# Altium PCB Board.PcbDoc
Units mm, origin at the board's own origin, x right, y up, seen from the top; angles counter-clockwise.
Board outline 69.22 x 45.72 mm, 2 copper layers (Top Layer, Bottom Layer); 47 components, 49 nets, 184 pads, 43 vias.
Unrouted connection lines stored in the file: 1.
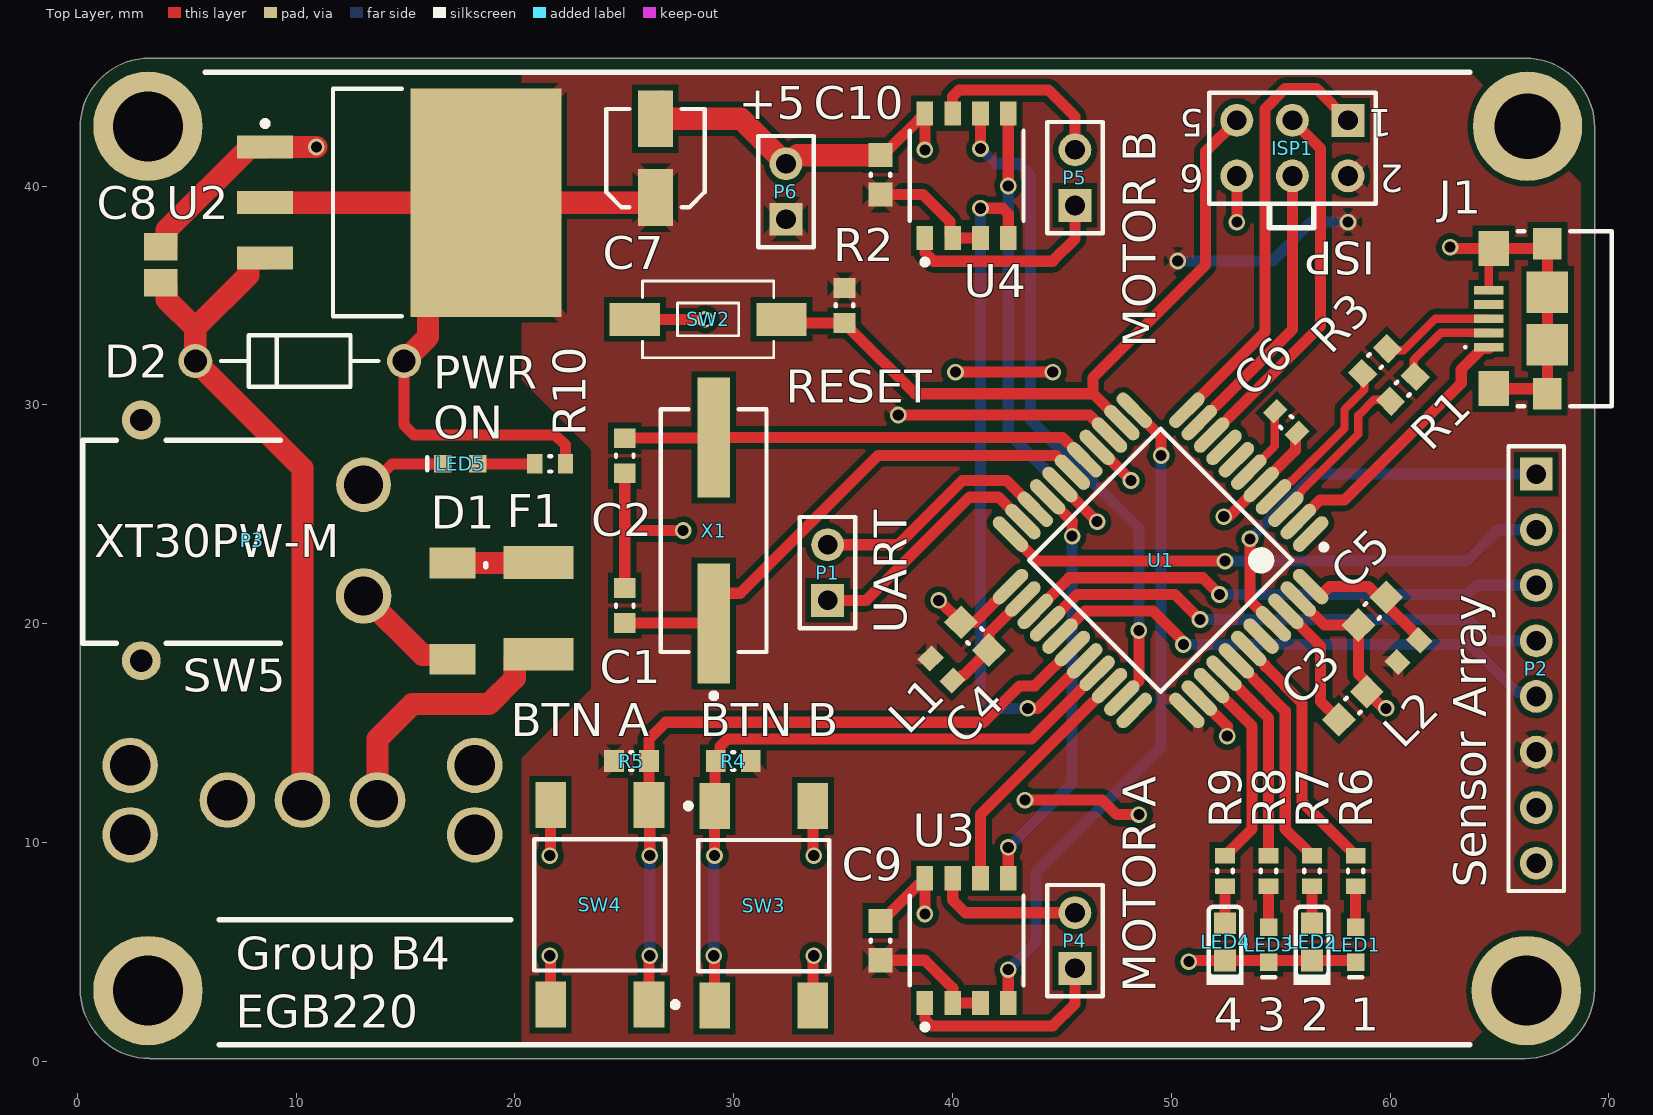
[diagram p0: Top Layer view]
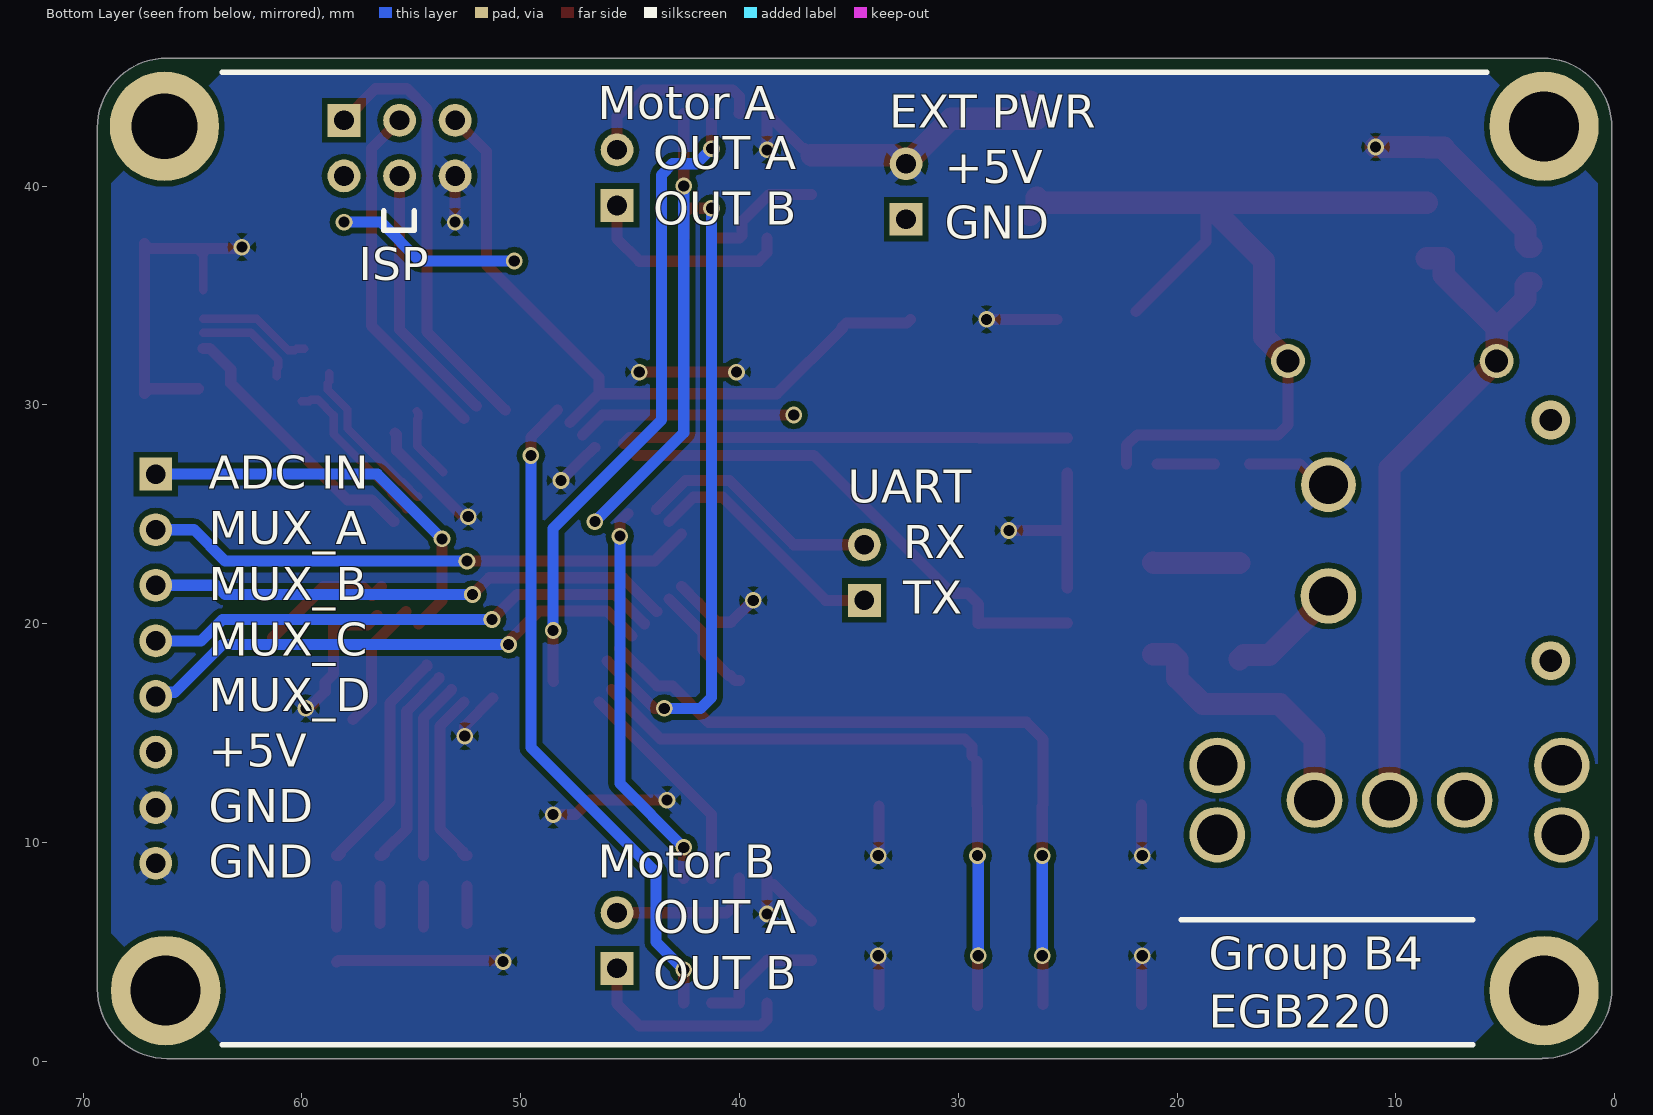
[diagram p1: Bottom Layer view, seen from below]

## Layer stack, top to bottom
Top Solder: solder mask 0.0102, Solder Resist, Dk 3.5
Top Layer: signal copper 0.0356
Dielectric 1: dielectric 0.32, FR-4, Dk 4.8
Bottom Layer: signal copper 0.0356
Bottom Solder: solder mask 0.0102, Solder Resist, Dk 3.5

## Board outline
0.13,3.302 0.13,42.672 0.127,42.672 cw(c3.302,42.672) 3.302,45.847 66.172,45.847 66.17,45.85 cw(c66.17,42.672) 69.347,42.672 69.345,42.675 69.345,3.302 cw(c66.17,3.302) 66.17,0.127 3.305,0.127 3.305,0.13 cw(c3.302,3.302)

## Design rules (kind name [scope] priority, off if disabled: settings)
Clearance [All] p1: gap=0.254 ignorepadtopadclearanceinfootprint=FALSE except(0: Arc-Hole Track-Hole SMDPad-Hole THPad-Hole Via-Hole Fill-Hole Poly-Hole Region-Hole Text-Hole)
DiffPairsRouting [All] p1: maxlimit=0.254 minlimit=0.254 mostfreqgap=0.254 toplayer_minwidth=0.381 toplayer_maxwidth=0.381 toplayer_prefwidth=0.381 bottomlayer_minwidth=0.381 bottomlayer_maxwidth=0.381 bottomlayer_prefwidth=0.381 maxuncoupledlength=12.7
PolygonConnect PolygonConnect_2 [All vs IsNamedPolygon('NONET_L01_P014')] p1: connectstyle=Direct reliefconductorwidth=0.254 reliefentries=4 polygonreliefangle="90 Angle" airgapwidth=0.254
PolygonConnect PolygonConnect_1 [All vs IsNamedPolygon('GND_L01_P008')] p2: connectstyle=Direct reliefconductorwidth=0.254 reliefentries=4 polygonreliefangle="90 Angle" airgapwidth=0.254
PolygonConnect [All] p3: connectstyle=Relief reliefconductorwidth=0.508 reliefentries=4 polygonreliefangle="45 Angle" airgapwidth=0.254
RoutingVias [All] p1: holewidth=0.508 width=0.762 viastyle="Through Hole" minholewidth=0.508 minwidth=0.762 maxholewidth=0.508 maxwidth=0.762
SolderMaskExpansion [All] p1: expansion=0.102
Width [All] p1: maxlimit=1.016 minlimit=0.254 preferedwidth=0.508 minimp=50.000000 maximp=50.000000 favimp=50.000000
29 further rules are at their usual default settings.

## Classes and differential pairs
component class MotorDriver: C9 C10 P4 P5 U3 U4
component class LinearRegulator: C7 C8 D2 LED5 P6 R10 U2
component class Input: D1 F1 LED1 LED2 LED3 LED4 P3 R4 R5 R6 R7 R8 R9 SW3 SW4 SW5
component class Control: C1 C2 C3 C4 C5 C6 ISP1 J1 L1 L2 P1 P2 R2 R3 SW2 U1 X1
differential pair USB: +USB_P -USB_N
differential pair USBCNX: +USBCNX_P -USBCNX_N

## Components (designator, comment, footprint, x,y, rotation, side; value= is the part's Value field where it differs from the comment)
C1 "CAP 22pF 16V" CAPC0603(1608)100_N 25.022,20.828 r270 top value=22pF
C2 "CAP 22pF 16V" CAPC0603(1608)100_N 25.022,27.681 r270 top value=22pF
C3 "CAP 100nF" CAPC0603(1608)100_M 58.296,16.256 r225 top value=100nF
C4 "CAP 100nF" CAPC0603(1608)100_M 41.024,19.431 r315 top value=100nF
C5 "CAP 100nF" CAPC0603(1608)100_M 59.185,20.574 r45 top value=100nF
C6 "CAP 1uF" CAPC0603(1608)100_L 55.248,29.21 r135 top value=1uF
C7 "UUD1E100MCL1GS" NIC-CAPA2-4X5.8_V 26.419,41.275 r90 top
C8 "TACR106M016XTA" CAPC2014X150X70NL20 3.813,36.401 r270 top
C9 "CAP 100nF" CAPC0603(1608)100_M 36.706,5.517 r270 top value=100nF
C10 "CAP 100nF" CAPC0603(1608)100_M 36.706,40.513 r270 top value=100nF
D1 "Schottky Rectifier 30V 5A" "SCHOTTKY DIODE 30V 5A" 17.148,20.574 r270 top
D2 "1N4002RLG" ONSC-AXIAL_LEAD-2-59-10_P 10.163,32.004 r0 top
F1 "5A 16V" "FUSE 5A 16V 1812" 21.085,20.701 r270 top
ISP1 "Header 3X2" HDR2X3 58.075,43.003 r180 top
J1 "1981568-1" TECO-1981568-5_V 64.511,33.939 r90 top
L1 "Inductor" 1608[0603] 39.5,17.907 r135 top value=10mH
L2 "Inductor" 1608[0603] 60.836,18.746 r225 top value=10mH
LED1 "2V 30mA 0603 Green" 0603_A 58.423,5.336 r90 top
LED2 "2V 20mA 0603 Org" KING-LED0603-25-ORANGE_V 56.433,5.458 r90 top
LED3 "2V 30mA 0603 Green" 0603_A 54.443,5.336 r90 top
LED4 "2V 20mA 0603 Org" KING-LED0603-25-ORANGE_V 52.454,5.458 r90 top
LED5 "2V 20mA 0603 Red" 0603_A 17.498,27.305 r0 top
P1 "UARTCON" HDR1X2 34.293,21.067 r90 top
P2 "SENSBOARD" HDR1X8 66.678,26.835 r270 top
P3 "XT30U- M" XT30U-M 8.004,23.808 r90 top
P4 "Header 2" HDR1X2 45.596,4.247 r90 top
P5 "Header 2" HDR1X2 45.596,39.116 r90 top
P6 "PWR IN" HDR1X2 32.388,38.481 r90 top
R1 "22R" RESC0603(1608)_N 60.582,30.734 r45 top value="22.00 Ohm"
R2 "10K 5% 0603(1608)" RESC0603(1608)_N 35.055,34.544 r90 top value="10000.00 Ohm"
R3 "22R" RESC0603(1608)_N 59.312,32.004 r45 top value="22.00 Ohm"
R4 "10K 5% 0603(1608)" RESC0603(1608)_N 29.975,13.716 r0 top value="10000.00 Ohm"
R5 "10K 5% 0603(1608)" RESC0603(1608)_N 25.326,13.716 r180 top value="10000.00 Ohm"
R6 "100R 5% 0603(1608)" RESC0603(1608)_L 58.423,8.698 r270 top value="100.00 Ohm"
R7 "100R 5% 0603(1608)" RESC0603(1608)_L 56.433,8.698 r90 top value="100.00 Ohm"
R8 "100R 5% 0603(1608)" RESC0603(1608)_L 54.443,8.698 r270 top value="100.00 Ohm"
R9 "100R 5% 0603(1608)" RESC0603(1608)_L 52.454,8.698 r90 top value="100.00 Ohm"
R10 "150R 5% 0603(1608)" RESC0603(1608)_L 21.611,27.305 r0 top value="150.00 Ohm"
SW2 "434121050816" 434121050816 28.832,33.909 r180 top
SW3 "4-1437565-1" TECO-4-1437565-1_V 31.372,7.113 r0 top
SW4 "4-1437565-1" TECO-4-1437565-1_V 23.879,7.152 r180 top
SW5 "1101M2S3__BE2" 1101M2S3__BE2 10.29,11.938 r90 top
U1 "ATmega32U4-AU" 44ML_M 49.508,22.896 r225 top
U2 "LM1084IS-5.0/NOPB" KTT0003B_L 14.735,39.243 r0 top
U3 "BD6221F-E2" ROHM-SOP-8_V 40.643,5.517 r90 top
U4 "BD6221F-E2" ROHM-SOP-8_V 40.643,40.475 r90 top
X1 "ATS16ASM-1" CTS-ATS-SM-XTAL-2 29.086,24.257 r90 top

## Footprints (in the part's own frame and the unit in brackets; to place one, negate y for a bottom-side part, rotate by r counter-clockwise, add the part's x,y. Pads: shape width x height; smd on the part's side, far side on the other; paste and mask are expansions set on the pad)
44ML_M [mm] "Thin QFP, 44-Leads, Body 10x10mm, Pitch 0.8mm, IPC Low Density"
  oval 2.05x0.6 smd: 1(-5.7,4) 2(-5.7,3.2) 3(-5.7,2.4) 4(-5.7,1.6) 5(-5.7,0.8) 6(-5.7,0) 7(-5.7,-0.8) 8(-5.7,-1.6) 9(-5.7,-2.4) 10(-5.7,-3.2) 11(-5.7,-4) 23(5.7,-4) 24(5.7,-3.2) 25(5.7,-2.4) 26(5.7,-1.6) 27(5.7,-0.8) 28(5.7,0) 29(5.7,0.8) 30(5.7,1.6) 31(5.7,2.4) 32(5.7,3.2) 33(5.7,4)
  oval 0.6x2.05 smd: 12(-4,-5.7) 13(-3.2,-5.7) 14(-2.4,-5.7) 15(-1.6,-5.7) 16(-0.8,-5.7) 17(0,-5.7) 18(0.8,-5.7) 19(1.6,-5.7) 20(2.4,-5.7) 21(3.2,-5.7) 22(4,-5.7) 34(4,5.7) 35(3.2,5.7) 36(2.4,5.7) 37(1.6,5.7) 38(0.8,5.7) 39(0,5.7) 40(-0.8,5.7) 41(-1.6,5.7) 42(-2.4,5.7) 43(-3.2,5.7) 44(-4,5.7)
  silkscreen extent -5.82,-4.25 4.25,4.97, body extent -5,-5 5,5, height 1.2
0603_A [mm] "Chip LED, 2-Leads, Body 1.6x0.8mm, IPC Medium Density"
  rect 0.8x0.8 smd: 1(-0.8,0) 2(0.8,0)
  silkscreen extent -1.5,-0.3 -1.5,0.3, body extent -0.8,-0.4 0.8,0.4, height 0.7
1101M2S3__BE2 [mil]
  round 100 hole 73: 1(0,135) 2(0,0) 3(0,-135) N/C(-62.5,310) N/C(-62.5,-310) N/C(62.5,310) N/C(62.5,-310)
  body extent -170,-320 170,320, height 525
1608[0603] [mm] "Chip Capacitor, Body 1.6x0.8mm, IPC High Density"
  rect 0.8x0.9 smd: 1(-0.7,0) 2(0.7,0)
  body extent -0.87,-0.47 0.87,0.47, height 1.3
434121050816 [mm] "6.0*3.5mm vertical type, SMD, height 5.0mm, black actuator, 160gf, T&R"
  rect 2.3x1.5 smd: 1(-3.35,0) 2(3.35,0)
  silkscreen extent -3,-1.75 3,1.75, body extent -4,-1.75 4,1.75, height 5
CAPC0603(1608)100_L [mm] "Chip Capacitor, Body 1.6x0.8mm, Height 1.0mm, IPC High Density"
  rect 0.7x0.9 smd: 1(-0.7,0) 2(0.7,0)
  silkscreen extent -0.05,-0.35 0.05,0.35, body extent -0.88,-0.47 0.88,0.48, height 1
CAPC0603(1608)100_M [mm] "Chip Capacitor, Body 1.6x0.8mm, Height 1.0mm, IPC Low Density"
  rect 1.1x1.1 smd: 1(-0.9,0) 2(0.9,0)
  silkscreen extent -0.05,-0.45 0.05,0.45, body extent -0.87,-0.47 0.88,0.48, height 1
CAPC0603(1608)100_N [mm] "Chip Capacitor, Body 1.6x0.8mm, Height 1.0mm, IPC Medium Density"
  rect 0.9x1 smd: 1(-0.8,0) 2(0.8,0)
  silkscreen extent -0.05,-0.4 0.05,0.4, body extent -0.87,-0.48 0.88,0.47, height 1
CAPC2014X150X70NL20 [mm] "Chip Capacitor, 2-Leads, Body 2.00x1.35mm, IPC Medium Density"
  rect 1.25x1.55 smd: 1(-0.825,0) 2(0.825,0)
  body extent -1.1,-0.77 1.1,0.77, height 1.5
CTS-ATS-SM-XTAL-2 [mm] "SMD, 2-Leads, Body 11.1x4.83mm, Pitch 8.5mm"
  rect 5.5x1.5 smd: 1(-4.25,0) 2(4.25,0)
  silkscreen extent -7.67,-2.41 5.55,2.41, body extent -5.59,-2.42 5.59,2.42, height 4.3
"FUSE 5A 16V 1812" [mm]
  rect 1.5x3.2 smd: 1(-2.1,0) 2(2.1,0)
  body extent -2.18,-1.59 2.18,1.59, height 0.76
HDR1X2 [mm] "Connector; Header; 2 Position"
  rect 1.5x1.5 hole 0.9: 1(0,0)
  round 1.5 hole 0.9: 2(2.54,0)
  silkscreen extent -1.27,-1.27 3.81,1.27
HDR1X8 [mm] "Connector; Header; 8 Position"
  rect 1.5x1.5 hole 0.9: 1(0,0)
  round 1.5 hole 0.9: 2(2.54,0) 3(5.08,0) 4(7.62,0) 5(10.16,0) 6(12.7,0) 7(15.24,0) 8(17.78,0)
  silkscreen extent -1.27,-1.27 19.05,1.27
HDR2X3 [mm] "Connector; Header; 3x2 Position"
  rect 1.5x1.5 hole 0.9: 1(0,0)
  round 1.5 hole 0.9: 2(0,2.54) 3(2.54,0) 4(2.54,2.54) 5(5.08,0) 6(5.08,2.54)
  silkscreen extent -1.27,-1.27 6.35,3.81
KING-LED0603-25-ORANGE_V [mm] "LED, SMT, Body 1.6 x 0.8 mm, 0.25mm Thickness"
  rect 1x1 smd paste+0 mask+0: 1(0.85,0) 2(-0.85,0)
  silkscreen extent -1.97,-0.85 1.6,0.85, body extent -0.8,-0.4 0.8,0.4, height 0.25
KTT0003B_L [mm] "D2-PAK, 3-Leads, Body 10.41x8.89mm, Pitch 2.54mm, IPC High Density"
  rect 2.55x1.05 smd: 1(-6.15,2.54) 2(-6.15,0) 3(-6.15,-2.54)
  rect 6.9x10.45 smd: 4(3.95,0)
  silkscreen extent -6.27,-5.2 0.1,5.2, body extent -6.83,-5.2 7.52,5.2, height 4.64
NIC-CAPA2-4X5.8_V [mm] "Aluminum Electrolytic Capacitor, Diameter 4mm, Height 6.1mm, Pitch 3.6mm"
  rect 2.6x1.6 smd: 1(-1.8,0) 2(1.8,0)
  silkscreen extent -2.25,-2.25 2.25,2.25, body extent -2,-1.98 2,2, height 6.1
ONSC-AXIAL_LEAD-2-59-10_P [mm] "AXIAL, 2-Leads, Diameter 2.35mm"
  round 1.55 hole 1.05: 1(-4.77,0) 2(4.77,0)
  silkscreen extent -3.59,-1.17 3.59,1.17
RESC0603(1608)_L [mm] "Chip Resistor, Body 1.6x0.8mm, IPC High Density"
  rect 0.7x0.9 smd: 1(-0.7,0) 2(0.7,0)
  silkscreen extent -0.05,-0.35 0.05,0.35, body extent -0.85,-0.47 0.85,0.47, height 0.6
RESC0603(1608)_N [mm] "Chip Resistor, Body 1.6x0.8mm, IPC Medium Density"
  rect 0.9x1 smd: 1(-0.8,0) 2(0.8,0)
  silkscreen extent -0.05,-0.4 0.05,0.4, body extent -0.85,-0.47 0.85,0.47, height 0.6
ROHM-SOP-8_V [mm] "SOP, 8-Leads, Body 5.2x4.6mm, Pitch 1.27mm"
  rect 1.1x0.76 smd: 1(-2.85,1.905) 2(-2.85,0.635) 3(-2.85,-0.635) 4(-2.85,-1.905) 5(2.85,-1.905) 6(2.85,-0.635) 7(2.85,0.635) 8(2.85,1.905)
  silkscreen extent -4.07,-2.6 2.05,2.6, body extent -2.3,-2.6 2.3,2.6, height 1.6
"SCHOTTKY DIODE 30V 5A" [mm]
  rect 1.4x2.1 smd: 1(-2.2,0) 2(2.2,0)
  silkscreen extent -2.16,1.52 -2.03,1.52, body extent -1.9,-1.25 1.9,1.25, height 0.25
TECO-4-1437565-1_V [mil] "SMD, 4-Leads, Body 6x6mm, Pitch 9.1mm"
  rect 55x83 smd: 1(-88.5,179.5) 2(-88.5,-179.5) 3(88.5,179.5) 4(88.5,-179.5)
  silkscreen extent -141,-118 118,184, body extent -118,-197 118,197, height 200
TECO-1981568-5_V [mm] "SMD, 5-Leads, Body 8x5.9mm, Pitch 0.65mm"
  rect 0.4x1.35 smd: 1(-1.3,0) 2(-0.65,0) 3(0,0) 4(0.65,0) 5(1.3,0)
  rect 1.6x1.4 smd: 6(-3.2,-0.225) 7(3.2,-0.225)
  rect 1.45x1.3 smd: 8(-3.425,-2.675) 9(3.425,-2.675)
  rect 1.9x1.9 smd: 10(-1.2,-2.675) 11(1.2,-2.675)
  silkscreen extent -4,-5.63 4,1.12, body extent -4,-5.63 4,0.28, height 3
XT30U-M [mil]
  round 100 hole 70: 1(-100,-200)
  round 98.43 hole 70: 2(100,-200)
  round 70 hole 40: N/C(-216.54,200) N/C(216.54,200)
  silkscreen extent -185,-50 180,305, body extent -185,-250 180,305, height 160

## Part data
C1 C2: library part CMP-1035-00808-1, "CAP 22pF 16V ±5% 0603 (1608 Metric) Thickness 1mm SMD", Case-EIA=0603, Case-Metric=1608, Rated Voltage="16 V", Tolerance=±5%, Max Thickness="1 mm", Technology=SMT
C3 C4 C5 C9 C10: library part CMP-1035-02583-1, "CAP 100nF 16V ±5% 0603 (1608 Metric) Thickness 1mm SMD", Case-EIA=0603, Case-Metric=1608, Rated Voltage="16 V", Tolerance=±5%, Max Thickness="1 mm", Technology=SMT
C6: library part CMP-1035-02740-1, "CAP 1uF 25V ±10% 0603 (1608 Metric) Thickness 1mm SMD", Case-EIA=0603, Case-Metric=1608, Rated Voltage="25 V", Tolerance=±10%, Max Thickness="1 mm", Technology=SMT
C7: library part CMP-0687-00016-1, "Aluminum Electrolytic Capacitor, UD Series, Low Impedance, 10 uF, 25 V, + / - 20%, -55 to 105 degC, Chip Type, 4 x 5.8 mm D x L, Pb-Free, Reel", Manufacturer=Nichicon, Rated Capacitance="10 uF", Rated Ripple Current (at 100kHz)="80 mA", Rated Voltage="25 V", Tolerance Rated Capacitance="-20 to 20%", ComponentLink1Description="Manufacturer URL", ComponentLink1URL=http://www.nichicon.co.jp/, ComponentLink2Description=Datasheet, ComponentLink2URL=http://products.nichicon.co.jp/en/pdf/XJA043/e-ud.pdf, ComponentLink3Description="Package Specification", ComponentLink3URL=http://products.nichicon.co.jp/en/pdf/XJA043/e-ud.pdf, DatasheetVersion=08/2012, Diameter="4 mm", Endurance Time="2000 h", Impedance="1.8 Ohm", Length="5.8 mm", Mounting Technology="Surface Mount", PackageDescription="2-Pin Surface Mount Device, Diameter 4 mm, Height 5.8 mm, Pitch 3.6 mm", PackageReference=CAPAE-D4H5.8, Packing="Dia382mm Reel", PartNumber=UUD1E100MCL1GS, RoHS=TRUE
C8: library part CMP-2007-00027-1, Manufacturer="AVX Interconnect / Elco", Part Number=TACR106M016XTA
D2: library part CMP-0902-00183-1, "Standard Recovery Rectifier, 2-Pin Axial_Lead, Pb-Free, Tape and Reel", Manufacturer="On Semiconductor", ComponentLink1Description="Manufacturer URL", ComponentLink1URL=http://www.onsemi.com/, ComponentLink2Description=Datasheet, ComponentLink2URL=http://www.onsemi.com/pub_link/Collateral/1N4001-D.PDF, ComponentLink3Description="Package Specification", ComponentLink3URL=http://www.onsemi.cn/pub_link/Collateral/59-10.PDF, DatasheetVersion="Rev. 13", IFSM Max (A)=30, IO(rec) Max (A)=1, Mounting Technology="Through Hole", PackageDescription="2-Pin, Axial Lead, Diameter 2.35 mm", PackageReference=AXIAL_LEAD-2-59-10, PackageVersion="Rev. U, 02/2005", Packing="Tape and Reel", PartNumber=1N4002RLG, RoHS=TRUE, Type="Standard Recovery", VRRM Max (V)=100
F1: library part "Fuse 16V 5A 1812", ComponentLink1Description=Datasheet, ComponentLink1URL=https://www.bourns.com/docs/Product-Datasheets/mfmsmf.pdf, ComponentLink2Description=Supplier, ComponentLink2URL=https://www.digikey.com.au/product-detail/en/bourns-inc/MF-MSMF250-16X-2/MF-MSMF250-16X-2CT-ND/3437789
ISP1: "Header, 3-Pin, Dual row", LatestRevisionDate=17-Jul-2002, LatestRevisionNote="Re-released for DXP Platform.", Publisher="Altium Limited"
J1: library part CMP-2000-05408-1, "Micro USB Receptacle Standard Type B Assy, 5-Pin SMD, RoHS, Tape and Reel", Current Rating (Max)=1/ContactA, Manufacturer="TE Connectivity", Operating Temperature Max Deg. C=85C, Operating Temperature Min Deg. C=-55C, Operating Temp Range=-55Cto85C, Voltage Rating Max=30VAC, Body Orientation=RightAngle, Contact Material=CopperAlloy, Contact Plating=GoldOverNickel, Datasheet URL=http://www.mouser.com/ds/2/418/NG_CD_1981568_E2-621296.pdf, Datasheet Version="Rev. E2, 08/2015", Gender=RCP, Housing Material=Thermoplastic, Manufacturer URL=http://www.te.com/, Mounting Style=SurfaceMount, Number of Contacts=5POS, Number of Ports=1Port, Number of Terminals=5, Packaging=TapeandReel, Pitch (mm)=0.65mm, Product Depth (mm)=5.6mm, Product Height (mm)=3mm, Product Length (mm)=8mm, Termination Method=Solder, Type=MicroUSB
LED1 LED3: library part CMP-1426-00006-1, "SMD mono-color Chip LED, WL-SMCW, Bright Green", Color="Bright Green", Manufacturer="Wuerth Elektronik", PartNumber=150060VS75000, ComponentLink1Description="Manufacturer URL", ComponentLink1URL=http://www.we-online.com, ComponentLink2Description=Datasheet, ComponentLink2URL=http://katalog.we-online.com/led/datasheet/150060VS75000.pdf, PackageReference=0603_A
LED2 LED4: library part CMP-0239-00002-1, "LED, SMT, 0603(1608), 0.25mm Tthickness, Super Bright Orange", Forward Current="30 mA", PartNumber=APG1608SEKC/T, Power Dissipation="75 mW", Reverse Voltage="5 V", Storage Temperature="-40 to 85 degC", ComponentLink1Description="Manufacturer URL", ComponentLink1URL=http://www.kingbrightusa.com/, ComponentLink2Description=Datasheet, ComponentLink2URL=http://www.kingbrightusa.com/images/catalog/SPEC/APG1608SEKC-T.pdf, DatasheetVersion="Rev. 4A, 12/2011", Mounting Technology="Surface Mount", PackageDescription="2-Pin SMT LED, 1.6 x 0.8 mm Body, 0.25mm Thickness", PackageReference=LED0603-25-ORANGE, PackageVersion="Rev. 4A, 12/2011", Packing=Reel
LED5: library part CMP-1426-00001-1, "SMD mono-color Chip LED, WL-SMCW, Red", Color=Red, Manufacturer="Wuerth Elektronik", PartNumber=150060RS75000, ComponentLink1Description="Manufacturer URL", ComponentLink1URL=http://www.we-online.com, ComponentLink2Description=Datasheet, ComponentLink2URL=http://katalog.we-online.com/led/datasheet/150060RS75000.pdf, PackageReference=0603_A
P1 P6: library part "Header 2", "Header, 2-Pin", LatestRevisionDate=17-Jul-2002, LatestRevisionNote="Re-released for DXP Platform.", Publisher="Altium Limited"
P2: library part "Header 8", "Header, 8-Pin", LatestRevisionDate=17-Jul-2002, LatestRevisionNote="Re-released for DXP Platform.", Publisher="Altium Limited"
P4 P5: "Header, 2-Pin", LatestRevisionDate=17-Jul-2002, LatestRevisionNote="Re-released for DXP Platform.", Publisher="Altium Limited"
R1 R3: library part CMP-1012-00034-1, "22R 0.1W 5% 0603 (1608 Metric)  SMD", Case-EIA=0603, Case-Metric=1608, Power="0.1 W", Tolerance="5 %", Technology=SMT
R2 R4 R5: library part CMP-1012-00098-1, "10K 0.1W 5% 0603 (1608 Metric)  SMD", Case-EIA=0603, Case-Metric=1608, Power="0.1 W", Tolerance="5 %", Technology=SMT
R6 R7 R8 R9: library part CMP-1012-00050-1, "100R 0.1W 5% 0603 (1608 Metric)  SMD", Case-EIA=0603, Case-Metric=1608, Power="0.1 W", Tolerance="5 %", Technology=SMT
R10: library part CMP-1012-00054-1, "150R 0.1W 5% 0603 (1608 Metric)  SMD", Case-EIA=0603, Case-Metric=1608, Power="0.1 W", Tolerance="5 %", Technology=SMT
SW2: library part CMP-1459-00007-1, "WS-TASV SMD Tact Switch 6.0X3.5 mm", Manufacturer="Wuerth Elektronik", ComponentLink1Description="Manufacturer URL", ComponentLink1URL=http://www.we-online.com, ComponentLink2Description=Datasheet, ComponentLink2URL=http://katalog.we-online.de/em/datasheet/434121050816.pdf, NoPins=02, PackageReference=434121050816, PartNumber=434121050816
SW3 SW4: library part CMP-2000-05602-1, "Tactile Switch, 50 mA, 12 VDC, -20 to 85 degC, 4-Pin SMD, RoHS, Bulk", Actuator Color=N/A, Contact Rating @ Voltage=0.05@12VDCA, Dielectric Strength=500VAC, Manufacturer=TEConnectivity/AMPBrand, Maximum Contact Resistance=100mOhm, Maximum DC Voltage Rating=12V, Minimum Insulation Resistance=100MOhm, Operating Force=1.57N, Operating Temperature=-20to85C, Package Description="4-Pin Surface Mount Device, Body 6 x 6 mm, Pitch 9.1 mm", Actuator Length=1.4mm, Actuator Style=RoundButton, Base Material=N/A, Body Orientation=Straight, Contact Material=CopperAlloy, Contact Plating=Silver, Datasheet URL=https://datasheet.ciiva.com/14635/0900766b80912216-14635826.pdf, Datasheet Version=04/2007, Dimension=6x10x5.25mm, Electrical Life=100000Cycle, Family=FSMJSMA, Ground Terminal=No, Housing Material=N/A, Illumination Type=N/R, Manufacturer URL=http://www.te.com/, Maximum AC Voltage Rating=N/A, Mechanical Life=N/A, Mounting=SurfaceMount,GullWing, Mounting Technology=SurfaceMount, Package Reference=4-1437565-1, Packaging=Bulk, Part No=4-1437565-1, Pole Throw Configuration=N/A, Product Weight=N/A, RoHS=Yes, Seal Description=N/A, Seal Location=N/A, Switch Configuration=N/A, Type=N/A
U1: library part CMP-0095-00285-2, "8-bit AVR Microcontroller, 2.7-5.5V, 16MHz, 32KB Flash, 1KB EEPROM, 2.5KB SRAM, USB Controller, 44-pin TQFP, Industrial Grade (-40°C to 85°C), Ext Osc", ComponentLink1Description="Manufacturer URL", ComponentLink1URL=http://www.atmel.com/, ComponentLink2Description="ATmega16U4/32U4 Datasheet", ComponentLink2URL=http://www.atmel.com/dyn/resources/prod_documents/doc7766.pdf, ComponentLink3Description="ATmega16U4 ATmega32U4 Summary", ComponentLink3URL=http://www.atmel.com/dyn/resources/prod_documents/7766S.pdf, DatasheetVersion="revF, Nov-2010", PackageDescription="44-Pin Plastic Thin Quad Flat Pack, 10 x 10 x 1.0 mm Body, 0.8 mm Pitch (TQFP)", PackageReference=44ML, PackageVersion="rev.G, Jul-2007", RevisionNote="DatasheetVersion updated. URLs added."
U2: library part CMP-0062-00575-5, "5A Low Dropout Positive Regulators, 3-pin TO-263, Pb-Free", Manufacturer="Texas Instruments", PackageTopMarking=NSUZXYTTE#*LM1084*IS-5.0, PowerWise=N, Code_JEDEC=MO-169-AA, ComponentLink1Description="Datasheet URL", ComponentLink1URL=http://www.ti.com/general/docs/lit/getliterature.tsp?genericPartNumber=LM1084&fileType=pdf, CompType="LDO IC", High-Reliability=Y, PackageDescription="TO-263, Molded, .400 x .390 x .180in, 3 Lead, .1in Pitch, Surface Mount", PackageReference=KTT0003B, PartNumber=LM1084IS-5.0/NOPB, PinCount=3, RoHS=Y
U3 U4: library part CMP-1539-00001-1, "DC Brush Motor Driver, 6 to 18 V, 1 A, -40 to 85 degC, 8-Pin SOP, RoHS, Tape and Reel", Manufacturer="ROHM Semiconductor", Output Current="1 A Max.", Supply Voltage="6 to 15 V", Temperature Range="-40 to 85 degC", ComponentLink1Description="Manufacturer URL", ComponentLink1URL=http://www.rohm.com/web/global/, ComponentLink2Description=Datasheet, ComponentLink2URL=http://rohmfs.rohm.com/en/products/databook/datasheet/ic/motor/dc/bd622x-e.pdf, ComponentLink3Description="Package Specification", ComponentLink3URL=http://rohmfs.rohm.com/en/products/databook/package/spec/ic/sop-1-2-e.pdf, DatasheetVersion="Rev. 003", Mounting Technology="Surface Mount", PackageDescription="8-Pin Small Outline Package, Body 5 x 4.4 mm, Pitch 1.27 mm", PackageVersion="Rev. A", Packing="Tape and Reel", PartNumber=BD6221F-E2, RoHS=TRUE, RON@IOUT="0.5 A=1.5 Ohm Typ."
X1: library part CMP-0585-00002-2, "ATS-SM Series Quartz Crystal, 16 MHz, -20 to 70 degC, 11.1 x 4.83 x 4.3mm SMD, RoHS, Tape and Reel", Frequency="16 MHz", Manufacturer="CTS Corporation", Operating Temperature="-20 to 70 degC", Shunt Capacitance (C0)="7.0 pF Max", ComponentLink1Description="Manufacturer URL", ComponentLink1URL=http://www.ctscorp.com/, ComponentLink2Description=Datasheet, ComponentLink2URL=http://www.ctscorp.com/components/Datasheets/008-0309-0.pdf, ComponentLink3Description="Package Specification", ComponentLink3URL=http://www.ctscorp.com/components/Datasheets/008-0309-0.pdf, Crystal Cut=AT-Cut, DatasheetVersion="Rev. K", Drive Level (Type)="100 uW", ESR Maximum="40 Ohms", Mounting Technology="Surface Mount", Oscillation Mode="Fundamental or 3rd Overtone", PackageDescription="2-Pin SMD, Body 11.1 x 4.83 mm, Pitch 8.5 mm", PackageReference=ATS-SM-XTAL-2, Packing="Tape and Reel", PartNumber=ATS16ASM-1, RoHS=TRUE
D1: ComponentLink1Description=Datasheet, ComponentLink1URL=https://assets.nexperia.com/documents/data-sheet/PMEG3050EP.pdf
L1 L2: Code_IEC=1005, Code_JEITA=0402, LatestRevisionDate=29-May-2009, LatestRevisionNote="IPC-7351 Footprint Added.", PackageDescription="Chip Inductor", PackageReference=0402-A, Published=8-Jun-2000, Publisher="Altium Limited"

## Free pads (board coordinates)
  round 5 hole 3.2 unplated: M3(3.23,3.232) M3(3.23,42.732) M3(66.23,3.232)
  round 5 hole 3 unplated: M3(66.28,42.732)

## Via types
v1: diameter 0.762, hole 0.508, Top Layer to Bottom Layer, 43 vias

## Nets (pads, with @x,y where several pads share a name; then routed paths per layer and width w, separated by ;. In a path a pad name is that pad's centre, name@x,y a point inside that pad or via, vN(x,y) a via of type N, cw(c..) or ccw(c..) an arc to the next point about the centre after c; other vN are vias at no path point)
+5: C7.1 C9.2 C10.2 D2.2 ISP1.2 L1.2 L2.2 P2.6 P6.1 R2.2 R4.2 R5.2 R10.2 U1.14 U1.34 U2.2 U2.4 U3.2 U3.3 U4.2 U4.3 | length 75.6
  Top Layer w0.508: D2.2 14.933,29.083 15.392,28.623 21.84,28.623 22.304,28.16 22.304,27.312 R10.2 ; U2.4 18.685,37.468 U2.4@21.881,34.272 ; C9.2 38.749,4.617 40.008,3.358 U3.2 U3.3 ; C10.2 38.654,39.613 39.882,38.385 39.882,37.751 U4.2 U4.3 ; v1(37.518,29.535) 46.263,29.535 U1.14
  Top Layer w1.016: U2.2 U2.4 ; D2.2 16.029,33.1 16.029,36.587 U2.4 ; C7.1 C7.1@26.419,38.975 ; C7.1@26.711,38.683 C7.1@26.419,38.975 ; U2.4 26.151,39.243 C7.1@26.419,38.975
  Bottom Layer w0.508: v1(50.295,36.576) 54.613,36.576 56.391,38.354 v1(58.075,38.354)
+7V4: C8.2 D2.1 SW5.2 U2.3 | length 31.4
  Top Layer w1.016: C8.2 3.963,35.576 4.08,35.459 4.08,34.824 5.393,33.511 ; U2.3 7.835,36.703 7.818,36.686 7.818,35.936 5.393,33.511 ; SW5.2 10.29,27.107 D2.1 5.393,33.511
GND: C1.1 C2.2 C3.1 C4.1 C5.1 C6.1 C7.2 C8.1 C9.1 C10.1 ISP1.6 J1.5 J1.6 J1.7 J1.8 J1.9 J1.10 J1.11 LED1.1 LED2.2 LED3.1 LED4.2 LED5.1 P2.7 P2.8 P3.2 P6.2 SW2.2 SW3.3 SW3.4 SW4.3 SW4.4 U1.5 U1.15 U1.23 U1.35 U1.43 U2.1 U3.8 U4.8 | length 112.1
  Top Layer w0.4: J1.5 J1.7@64.511,36.914
  Top Layer w0.508: P3.2 13.42,26.348 14.377,27.305 LED5.1 ; v1(21.593,4.826) 21.631,4.788 SW4.3 ; v1(21.593,9.398) 21.631,9.436 SW4.4 ; C1.1 25.022,24.255 ; C2.2 25.022,24.255 ; SW2.2 v1(28.705,33.909) ; v1(27.689,24.257) 27.686,24.255 25.022,24.255 ; SW3.4 33.619,4.788 v1(33.658,4.826) ; SW3.3 33.619,9.436 v1(33.658,9.398) ; C9.1 37.002,6.713 37.084,6.713 38.442,8.071 38.612,8.071 U3.8@38.738,8.197 ; C10.1 37.002,41.709 37.122,41.709 38.442,43.029 38.612,43.029 U4.8@38.738,43.155 ; v1(38.738,6.731) U3.8@38.738,8.197 ; U3.8 U3.8@38.738,8.197 ; v1(38.738,41.656) U4.8@38.738,43.155 ; U4.8 U4.8@38.738,43.155 ; v1(39.373,21.067) 39.388,21.067 C4.1 41.023,20.067 U1.23 42.625,21.694 41.886,20.955 ; v1@40.262,31.496 v1(44.58,31.496) ; v1(43.31,11.938) 46.833,11.938 47.501,11.271 v1(48.517,11.271) ; U1.15 46.634,28.058 47.193,27.499 47.201,27.499 v1(48.157,26.543) ; v1(50.803,4.557) 50.854,4.608 LED4.2 LED2.2 58.35,4.608 LED1.1 ; U1.35 52.554,15.325 v1(52.554,14.859) ; v1(52.396,24.892) 52.636,24.892 U1.5 55.672,27.928 55.672,28.644 C6.1 ; v1(52.995,38.354) ISP1.6 ; 56.557,20.373 56.992,19.938 C5.1 58.548,17.695 58.932,17.311 C3.1 59.695,16.129 v1(59.82,16.129) ; v1(62.741,37.211) 62.813,37.139 64.511,37.139 J1.7 ; J1.7@64.511,36.914 J1.7 ; J1.6 66.961,30.739 J1.8 67.186,30.739 J1.10 J1.11 67.186,37.139 J1.9 66.961,37.139 J1.7
  Top Layer w1.016: C8.1 3.963,37.226 4.08,37.343 4.08,37.986 7.818,41.724 7.818,41.766 8.568,41.766 U2.1 v1(10.925,41.783) ; C7.2@26.711,43.867 26.419,43.575 C7.2 30.334,43.075 P6.2 32.519,41.021 32.911,41.413 C10.1
  other v1: 40.135,31.496
MCU_BTN_A: R4.1 SW3.1 SW3.2 U1.30 | length 29.2
  Top Layer w0.508: v1(29.086,4.826) 29.124,4.788 SW3.2 ; v1(29.124,9.398) SW3.1 29.149,11.698 29.149,13.691 R4.1 ; R4.1@29.371,13.962 29.371,14.382 29.721,14.732 43.607,14.732 45.854,16.979
  Bottom Layer w0.508: v1(29.086,4.826) 29.086,9.36 v1(29.124,9.398)
MCU_BTN_B: R5.1 SW4.1 SW4.2 U1.28 | length 33.2
  Top Layer w0.508: SW4.1 26.126,4.788 v1(26.165,4.826) ; v1(26.165,9.398) 26.165,11.673 SW4.2 R5.1 26.126,14.732 26.888,15.494 41.405,15.494 43.056,17.145 43.758,17.145 U1.28
  Bottom Layer w0.508: v1(26.165,4.826) v1(26.165,9.398)
MCU_LED_A: R6.1 U1.39 | length 10.5
  Top Layer w0.508: 54.294,18.11 54.294,18.057 55.967,16.383 55.967,11.853 58.227,9.594 58.227,9.494 58.323,9.398 R6.1
MCU_LED_B: R7.2 U1.38 | length 9.3
  Top Layer w0.508: 53.728,17.545 53.728,17.491 55.205,16.014 55.205,10.626 56.237,9.594 56.237,9.494 56.333,9.398 R7.2
MCU_LED_C: R8.1 U1.37 | length 8.1
  Top Layer w0.508: 53.162,16.979 54.443,15.698 R8.1
MCU_LED_D: R9.2 U1.36 | length 8
  Top Layer w0.508: R9.2 52.554,9.398 52.65,9.494 52.65,9.594 53.681,10.626 53.681,15.329 52.597,16.413
MCU_MISO: ISP1.1 U1.11 | length 20
  Top Layer w0.508: U1.11@50.705,29.76 54.277,33.333 54.277,43.524 55.203,44.45 56.628,44.45 ISP1.1
MCU_MOSI: ISP1.4 U1.10 | length 12
  Top Layer w0.508: 52.031,29.944 55.535,33.448 ISP1.4
MCU_RESET: ISP1.5 R2.1 SW2.1 U1.13 | length 32.8
  Top Layer w0.508: SW2.1 32.347,33.744 R2.1 35.105,33.744 35.301,33.548 35.301,33.498 38.289,30.51 46.42,30.51 ; U1.13 46.42,30.51 ; ISP1.5 51.565,41.572 51.565,36.387 46.42,31.242 46.42,30.51
MCU_RX: P1.2 U1.20 | length 11.2
  Top Layer w0.508: P1.2 37.518,23.607 40.454,26.543 42.467,26.543 U1.20
MCU_SCK: ISP1.3 U1.9 | length 15.9
  Top Layer w0.508: 52.597,29.378 56.817,33.599 56.817,41.721 ISP1.3
MCU_TX: P1.1 U1.21 | length 11.3
  Top Layer w0.508: P1.1 36.056,21.067 40.77,25.781 42.098,25.781 U1.21
MOTOR_A_DUTY: U1.31 U3.6 | length 10.2
  Top Layer w0.508: U3.6 41.278,11.271 46.42,16.413
MOTOR_A_FORWARD: U1.12 U3.4 | length 30.5
  Top Layer w0.508: U3.4 v1(42.548,4.191) ; U1.12@48.312,29.76 49.533,28.54 v1(49.533,27.686)
  Bottom Layer w0.508: v1(42.548,4.191) 43.818,5.461 43.818,8.636 49.533,14.351 v1(49.533,27.686)
MOTOR_A_REVERSE: U1.19 U3.5 | length 18
  Top Layer w0.508: U3.5 v1(42.548,9.779) ; 45.101,25.04 45.478,24.664 45.469,24.654 v1(45.469,24.003)
  Bottom Layer w0.508: v1(42.548,9.779) 45.469,12.7 v1(45.469,24.003)
MOTOR_B_DUTY: U1.32 U4.6 | length 29.6
  Top Layer w0.508: v1(41.278,41.709) U4.6 ; 48.496,17.358 48.517,17.379 v1(48.517,19.685)
  Bottom Layer w0.508: v1(41.278,41.709) 41.966,41.021 43.056,41.021 43.564,40.513 43.564,29.308 48.517,24.355 v1(48.517,19.685)
MOTOR_B_FORWARD: U1.29 U4.4 | length 30.7
  Top Layer w0.508: v1(41.278,38.989) 42.294,38.989 42.548,38.735 U4.4 ; v1(43.437,16.129) 43.873,16.129 U1.29
  Bottom Layer w0.508: v1(41.278,38.989) 41.278,16.637 41.786,16.129 v1(43.437,16.129)
MOTOR_B_REVERSE: U1.18 U4.5 | length 22.7
  Top Layer w0.508: v1(42.548,40.005) U4.5 ; U1.18 v1(46.609,24.664)
  Bottom Layer w0.508: v1(42.548,40.005) 42.548,28.725 v1(46.609,24.664)
NetC3_2: C3.2 U1.42 | length 5.9
  Top Layer w0.508: U1.42 56.825,18.973 56.825,16.453 C3.2
NetC4_2: C4.2 L1.1 U1.24 | length 5.2
  Top Layer w0.508: L1.1 40.201,17.412 40.409,17.62 40.485,17.62 C4.2 41.66,19.573 U1.24
NetC5_2: C5.2 L2.1 U1.44 | length 6.4
  Top Layer w0.508: U1.44 56.765,21.296 56.825,21.296 57.224,21.694 59,21.694 59.652,21.041 61.331,19.363 L2.1
NetC6_2: C6.2 U1.6 | length 3.3
  Top Layer w0.381: U1.6 54.732,28.12 54.732,29.358 54.682,29.409 54.682,29.634 C6.2
NetD1_1: D1.1 F1.1 | length 3.9
  Top Layer w1.016: D1.1 21.058,22.774 F1.1
NetD1_2: D1.2 P3.1 | length 5.3
  Top Layer w1.016: P3.1 15.786,18.566 16.956,18.566 D1.2
NetF1_2: F1.2 SW5.3 | length 12.3
  Top Layer w1.016: SW5.3 13.719,14.732 15.312,16.325 18.809,16.325 19.993,17.509 19.993,18.359 20.235,18.601 F1.2
NetLED1_2: LED1.2 R6.2 | length 1.9
  Top Layer w0.508: LED1.2 R6.2
NetLED2_1: LED2.1 R7.1 | length 1.7
  Top Layer w0.508: LED2.1 R7.1
NetLED3_2: LED3.2 R8.2 | length 1.9
  Top Layer w0.508: LED3.2 R8.2
NetLED4_1: LED4.1 R9.1 | length 1.7
  Top Layer w0.508: LED4.1 R9.1
NetLED5_2: LED5.2 R10.1 | length 2.6
  Top Layer w0.508: LED5.2 R10.1
NetP4_1: P4.1 U3.1 | length 9.8
  Top Layer w0.508: U3.1 38.738,1.907 39.035,1.609 44.58,1.609 45.596,2.625 P4.1
NetP4_2: P4.2 U3.7 | length 6.8
  Top Layer w0.508: U3.7 40.008,7.366 40.587,6.787 P4.2
NetP5_1: P5.1 U4.1 | length 9.6
  Top Layer w0.508: U4.1 38.738,36.957 39.128,36.567 44.58,36.567 45.596,37.583 P5.1
NetP5_2: P5.2 U4.7 | length 8.5
  Top Layer w0.508: U4.7 39.995,43.338 39.995,44.085 40.292,44.383 44.393,44.383 45.596,43.18 P5.2
SENS_ADC: P2.1 U1.41 | length 18.6
  Top Layer w0.508: v1(53.597,23.876) 53.597,21.07 U1.41
  Bottom Layer w0.508: v1(53.597,23.876) 56.555,26.835 P2.1
SENS_MUX_A: P2.2 U1.22 | length 25.1
  Top Layer w0.508: U1.22 43.887,22.86 v1(52.454,22.86)
  Bottom Layer w0.508: v1(52.454,22.86) 63.503,22.86 64.937,24.295 P2.2
SENS_MUX_B: P2.3 U1.25 | length 24
  Top Layer w0.508: U1.25 45.316,22.098 51.438,22.098 v1(52.2,21.336)
  Bottom Layer w0.508: v1(52.2,21.336) 63.503,21.336 63.921,21.755 P2.3
SENS_MUX_C: P2.4 U1.26 | length 23.8
  Top Layer w0.508: U1.26 45.686,21.336 50.168,21.336 v1(51.311,20.193)
  Bottom Layer w0.508: v1(51.311,20.193) 63.63,20.193 64.608,19.215 P2.4
SENS_MUX_D: P2.5 U1.27 | length 23.9
  Top Layer w0.508: U1.27 46.055,20.574 49.152,20.574 50.549,19.177 v1(50.549,19.05)
  Bottom Layer w0.508: v1(50.549,19.05) 63.63,19.05 65.815,16.864 66.488,16.864 P2.5
USB_N: R1.1 U1.3 | length 7.5
  Top Layer w0.381: U1.3 55.236,25.289 55.927,25.98 55.927,26.037 58.55,28.66 58.55,29.523 59.264,30.238 59.58,30.238 59.649,30.168 R1.1
USB_P: R3.1 U1.4 | length 7.5
  Top Layer w0.381: U1.4 54.729,25.795 55.421,26.486 55.478,26.486 57.915,28.923 57.915,29.786 58.815,30.687 58.815,31.002 58.746,31.071 R3.1
USBCNX_N: J1.2 R1.2 | length 4.7
  Top Layer w0.381: R1.2 61.147,31.667 61.078,31.736 61.078,32.051 62.323,33.296 63.649,33.296 63.651,33.294 64.505,33.294 J1.2
USBCNX_P: J1.3 R3.2 | length 5.3
  Top Layer w0.381: R3.2 60.244,32.57 60.313,32.501 60.629,32.501 62.06,33.931 63.649,33.931 63.651,33.933 64.505,33.933 J1.3
VBUS: J1.1 U1.2 U1.7 | length 12.4
  Top Layer w0.508: U1.2 56.792,25.654 57.915,25.654 63.249,30.988 63.249,31.623 64.206,32.581 J1.1@64.511,32.581
X1_16MHz: C1.2 U1.17 X1.1 | length 23.4
  Top Layer w0.508: C1.2 29.065,20.028 X1.1 29.086,20.898 29.582,21.394 30.3,21.394 36.588,27.681 44.723,27.681
X2_16MHz: C2.1 U1.16 X1.2 | length 20.4
  Top Layer w0.508: C2.1 29.06,28.481 X1.2 45.029,28.507 45.289,28.247
pads on no net: J1.4 P3.N/C SW5.1 SW5.N/C U1.1 U1.8 U1.33 U1.40

## Polygon pours and split planes (outlines as drawn)
GND on Bottom Layer "Bottom Layer-GND" (solid, pour order 16): 63.63,45.212 68.71,40.132 68.71,5.842 63.63,0.762 6.48,0.762 0.765,6.477 0.765,40.132 5.845,45.212
no net on Bottom Layer "Bottom Layer-No Net" (solid, pour order 18): 20.069,10.351
+5 on Top Layer "Top Layer-+5" (solid, pour order 20): 20.323,13.846 23.498,17.021 23.498,27.94 20.323,31.115 20.323,45.212 63.651,45.212 68.71,40.154 68.71,5.842 63.63,0.762 20.323,0.762

## Silkscreen, mask and mechanical layers (free items; w line width, h text height)
Top Overlay:
  lines w0.254: 5.845,45.212 63.63,45.212 ; 6.48,0.762 63.63,0.762 ; 6.48,6.477 19.815,6.477 ; 54.486,39.116 54.486,38.989 54.486,38.1 56.518,38.1 56.518,39.116
  text "+5" at 30.236,43.053 h1.52
  text "ISP" at 59.312,37.465 h1.52 r180
  text "MOTOR B" at 49.279,32.615 h1.52 r90
  text "RESET" at 32.388,30.099 h1.52
  text "PWR / ON" at 16.259,28.448 h1.52
  text "UART" at 37.911,19.544 h1.52 r90
  text "BTN A" at 19.815,14.859 h1.52
  text "BTN B" at 28.451,14.859 h1.52
  text "Sensor Array" at 64.392,7.939 h1.52 r90
  text "Group B4" at 7.242,4.191 h1.52
  text "MOTOR A" at 49.279,3.131 h1.52 r90
  text "EGB220" at 7.242,1.524 h1.52
  text "4" at 51.946,1.397 h1.52
  text "3" at 53.935,1.397 h1.52
  text "2" at 55.925,1.397 h1.52
  text "1" at 58.169,1.397 h1.52
Bottom Overlay:
  lines w0.254: 5.845,45.212 63.63,45.212 ; 6.48,0.762 63.63,0.762 ; 6.48,6.477 19.815,6.477 ; 54.867,38.862 54.867,37.973 55.47,37.973 55.66,37.973 56.264,37.973 56.264,38.862
  text "Motor A" at 46.485,43.053 h1.52
  text "EXT PWR" at 33.15,42.672 h1.52
  text "OUT A" at 43.945,40.767 h1.52
  text "+5V" at 30.61,40.132 h1.52
  text "OUT B" at 43.945,38.227 h1.52
  text "GND" at 30.61,37.592 h1.52
  text "ISP" at 57.407,35.687 h1.52
  text "ADC IN" at 64.265,26.162 h1.52
  text "UART" at 35.055,25.527 h1.52
  text "MUX_A" at 64.265,23.622 h1.52
  text "RX" at 32.515,22.987 h1.52
  text "MUX_B" at 64.265,21.082 h1.52
  text "TX" at 32.515,20.447 h1.52
  text "MUX_C" at 64.265,18.542 h1.52
  text "MUX_D" at 64.265,16.002 h1.52
  text "+5V" at 64.265,13.462 h1.52
  text "GND" at 64.265,10.922 h1.52
  text "Motor B" at 46.485,8.382 h1.52
  text "GND" at 64.265,8.382 h1.52
  text "OUT A" at 43.945,5.842 h1.52
  text "Group B4" at 18.545,4.191 h1.52
  text "OUT B" at 43.945,3.302 h1.52
  text "EGB220" at 18.545,1.524 h1.52
Mechanical 1:
  lines w0.254: 0.127,42.672 cw(c3.302,42.672) 3.302,45.847 66.172,45.847 ; 0.13,42.672 0.13,3.302 ccw(c3.302,3.302) 3.305,0.13 ; 3.305,0.127 66.17,0.127 ccw(c66.17,3.302) 69.345,3.302 69.345,42.675 ; 66.17,45.85 cw(c66.17,42.672) 69.347,42.672

## Text inside footprints (layer, text, board x,y; h text height)
ISP1: Top Overlay "6" at 51.471,40.971 h1.27 r180; Top Overlay "5" at 51.471,43.511 h1.27 r180; Top Overlay "2" at 60.615,40.971 h1.27 r180; Top Overlay "1" at 60.107,43.511 h1.27 r180
P3: Top Overlay "XT30PW-M" at 0.765,23.046 h1.52